# Altium PCB HandHeld_Terminal_V2.PcbDoc (part 1 of 2)
Units mil, origin at the board's own origin, x right, y up, seen from the top; angles counter-clockwise.
Board outline 1653.54 x 2401.57 mil, 4 copper layers (Top Layer, GND_02, PWR_03, Bottom Layer), stack 23.756 mil thick; 120 components, 79 nets, 410 pads, 246 vias.
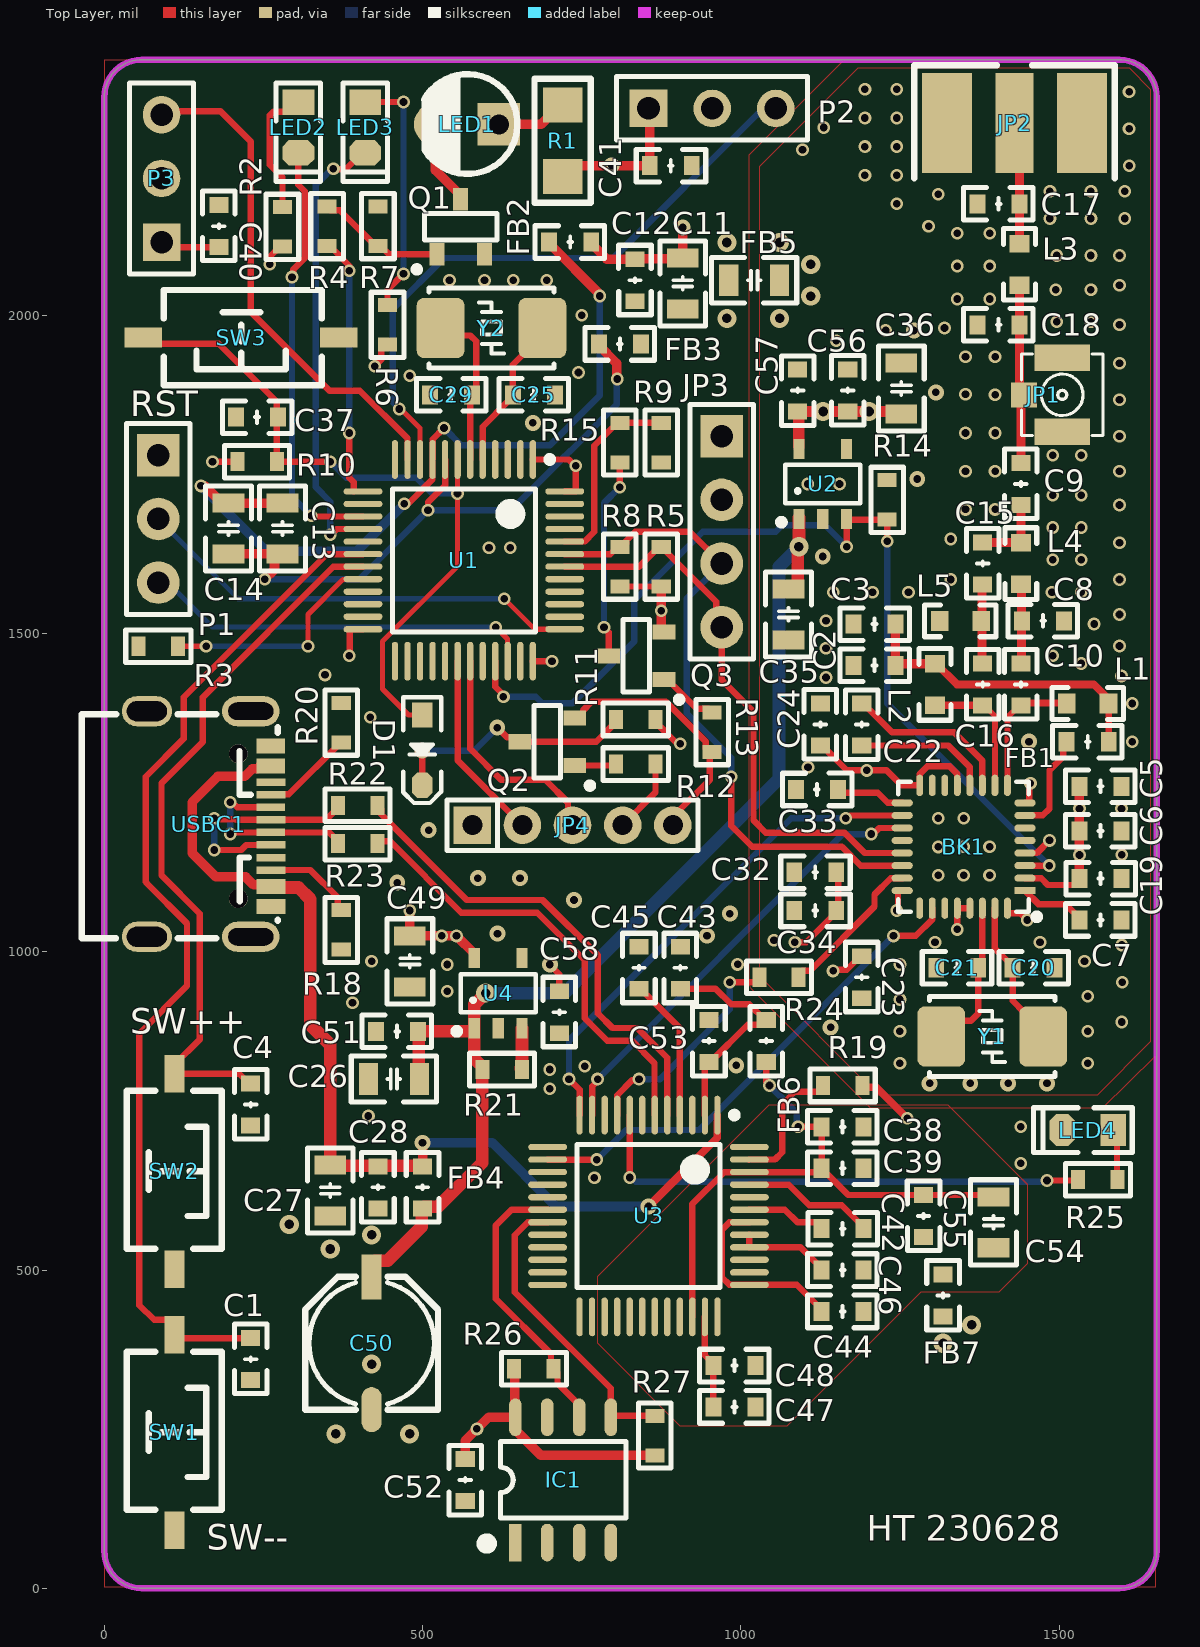
[diagram p0: Top Layer view]
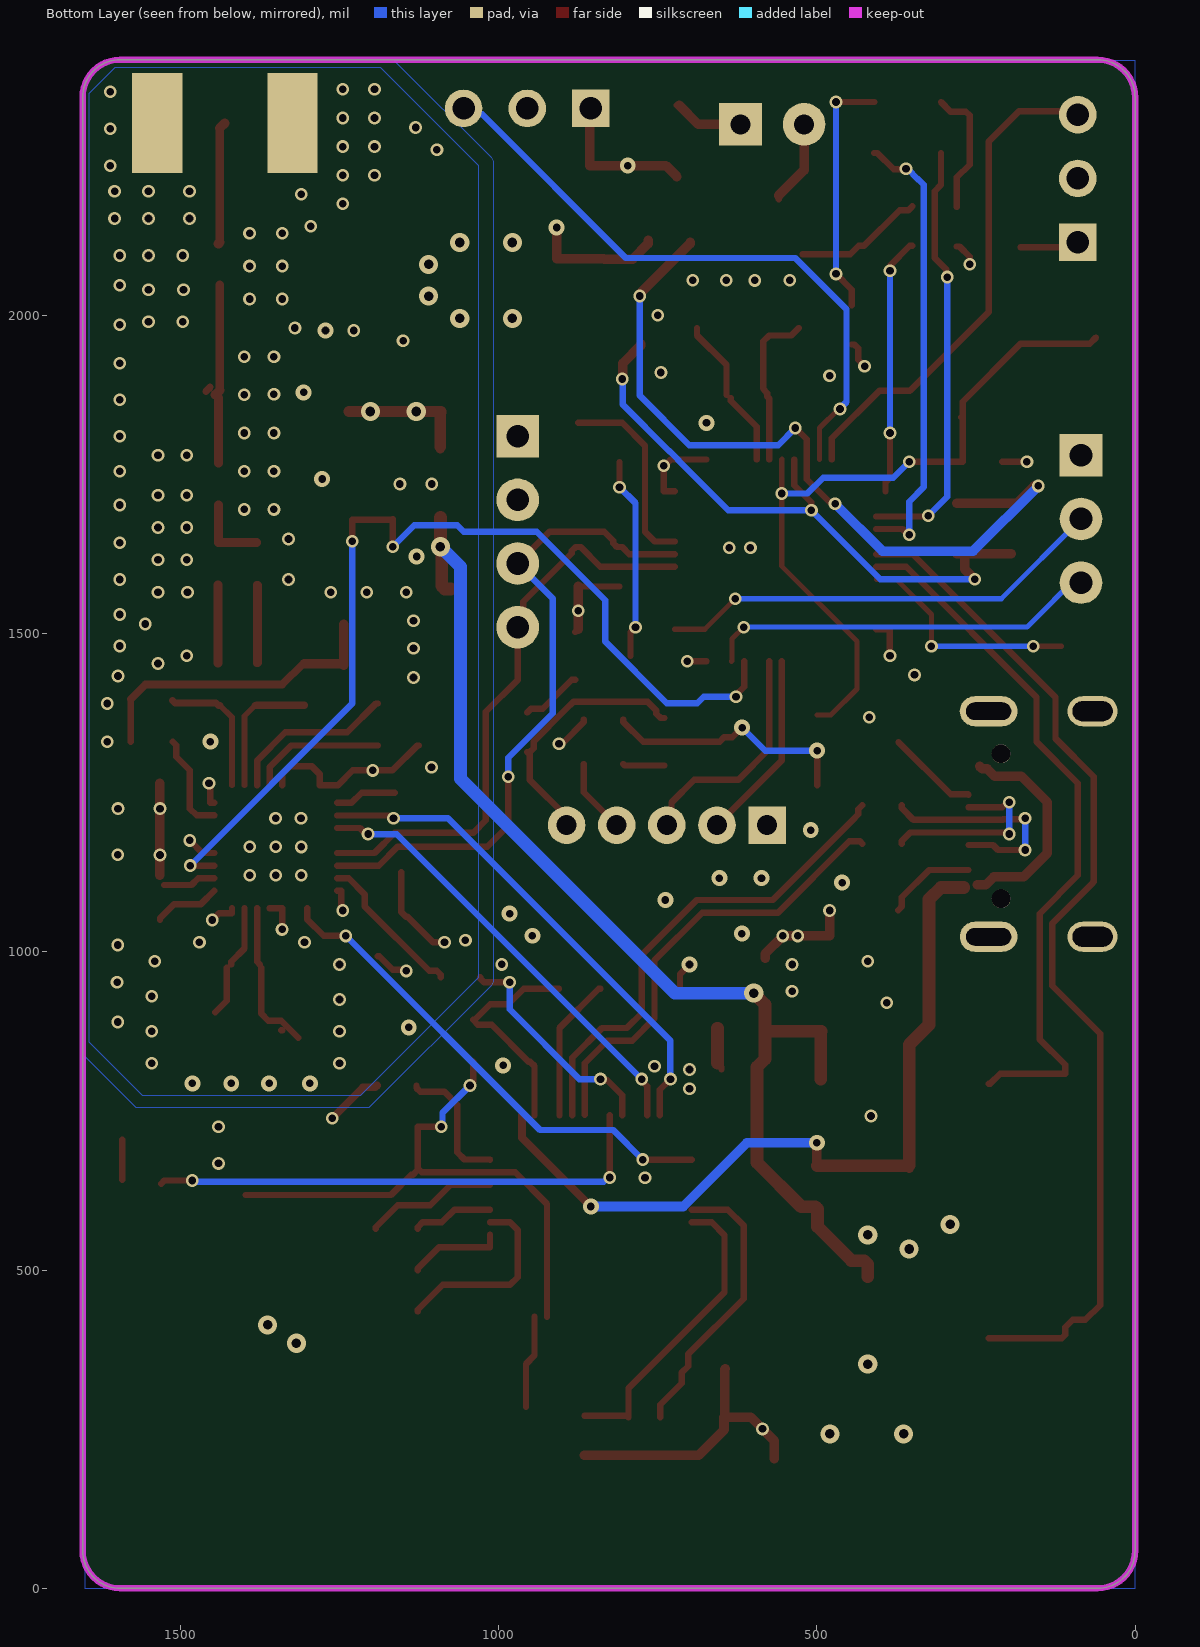
[diagram p1: Bottom Layer view, seen from below]
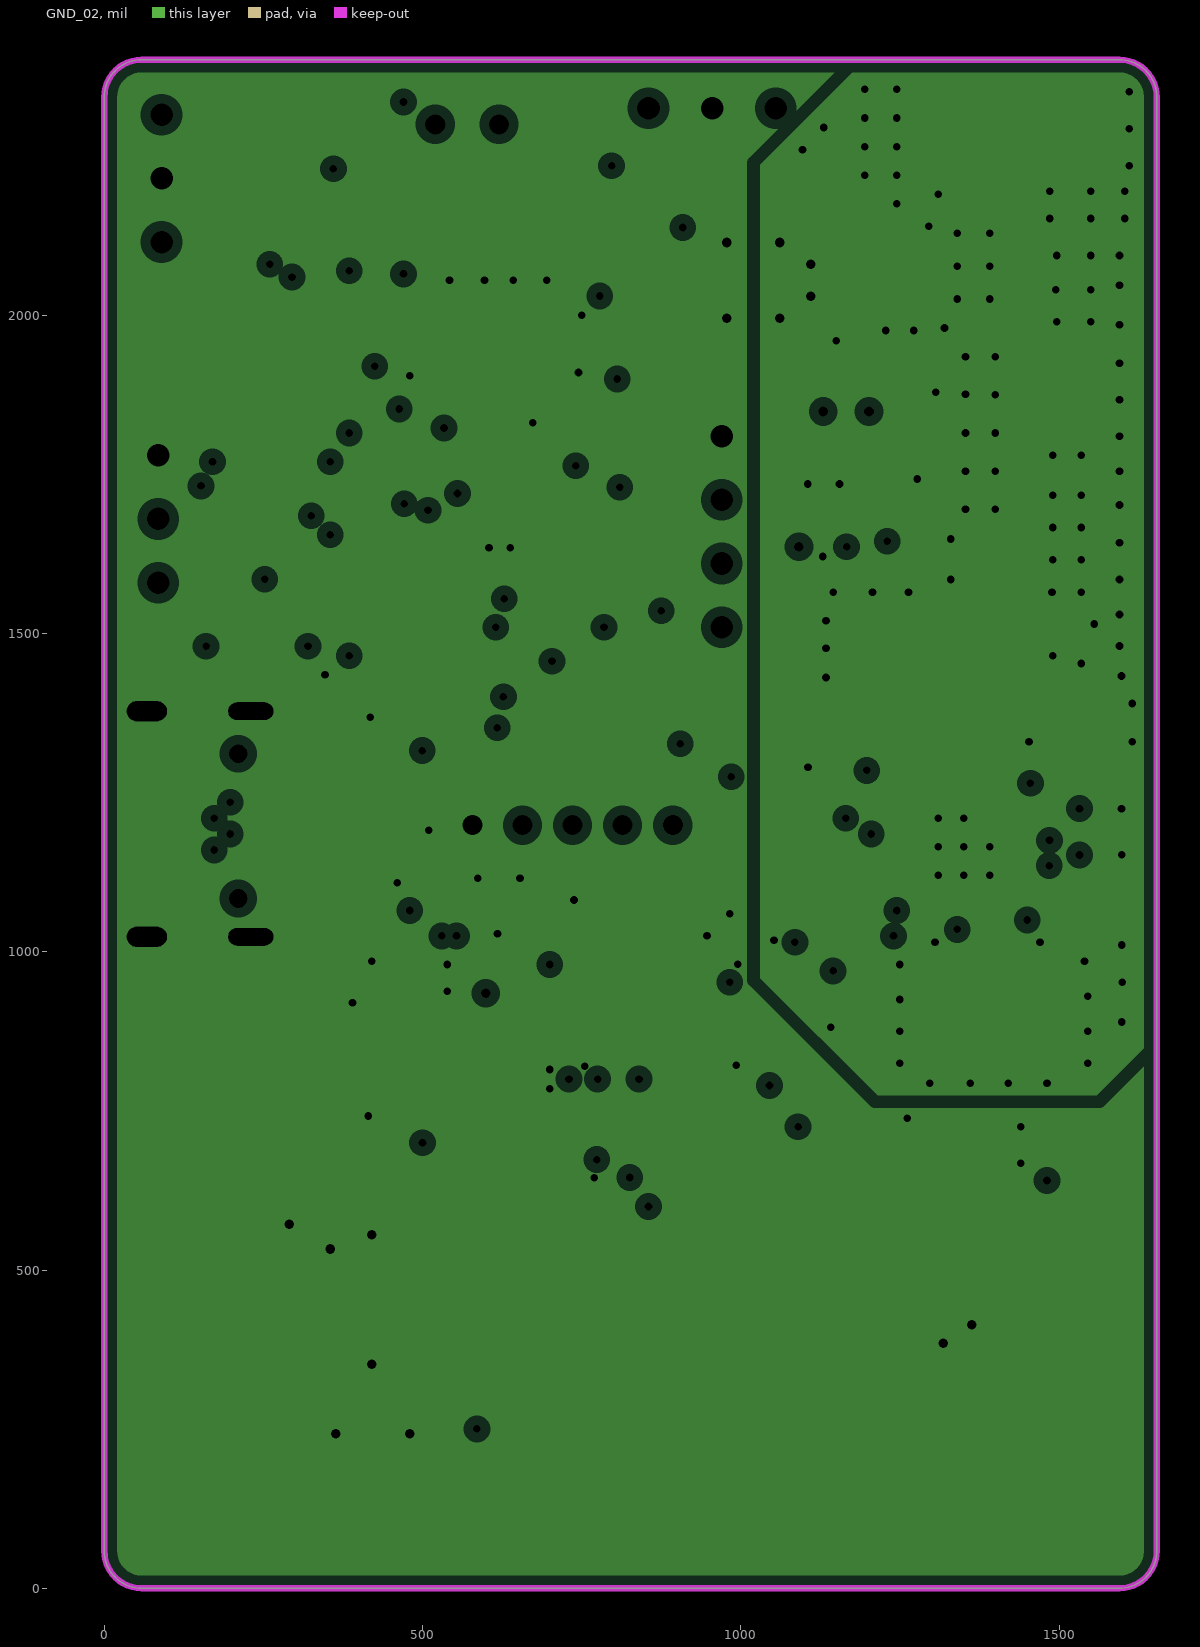
[diagram p2: GND_02, clearances drawn from the general rule]
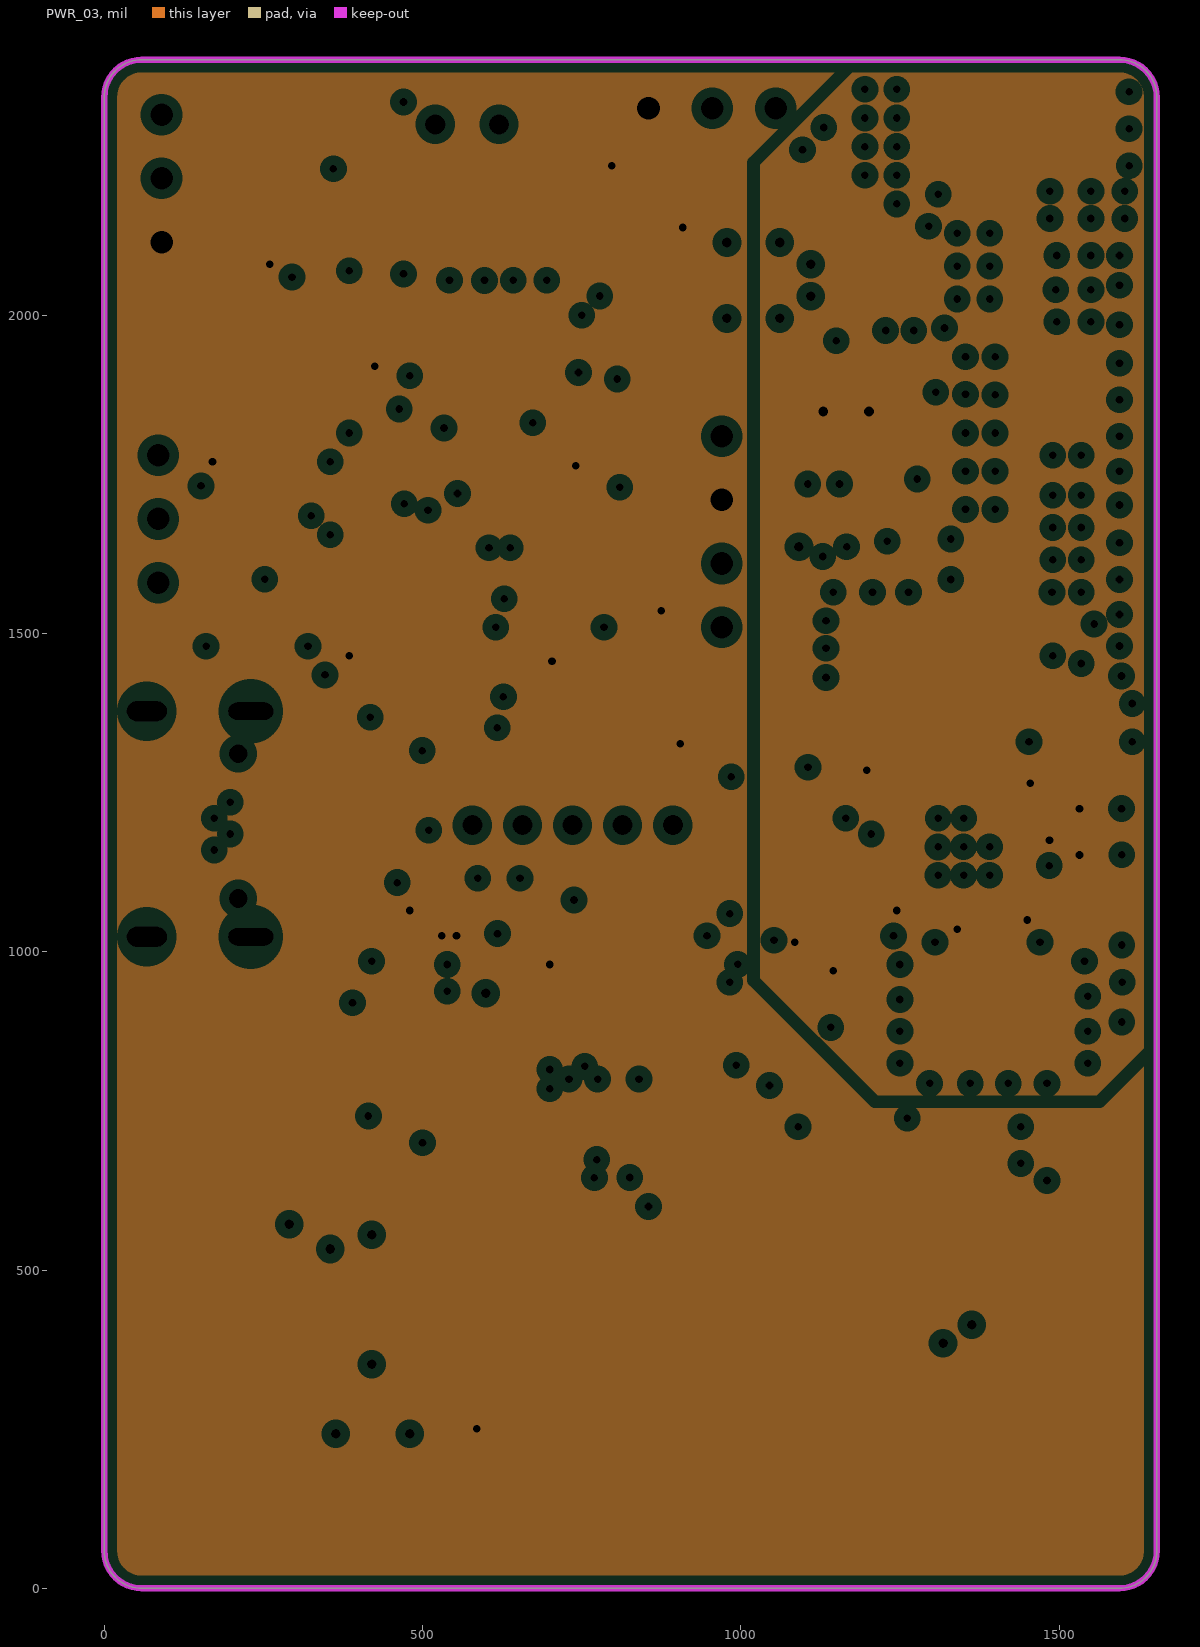
[diagram p3: PWR_03, clearances drawn from the general rule]

## Layer stack, top to bottom
Top Solder: solder mask 0.4, Solder Resist, Dk 3.5
Top Layer: signal copper 1.4
Dielectric 2: prepreg 2.8, PP-006, Dk 4.1
GND_02: plane copper 1.378, net (Multiple Nets)
Dielectric 1: dielectric 12.6, FR-4, Dk 4.8
PWR_03: plane copper 1.378, net (Multiple Nets)
Dielectric 3: prepreg 2.8, PP-006, Dk 4.1
Bottom Layer: signal copper 1.4
Bottom Solder: solder mask 0.4, Solder Resist, Dk 3.5

## Board outline
0,59.06 0,2342.52 cw(c59.06,2342.52) 59.06,2401.57 1594.49,2401.57 cw(c1594.49,2342.52) 1653.54,2342.52 1653.54,59.06 cw(c1594.49,59.06) 1594.49,0 59.06,0 cw(c59.06,59.06)

## Design rules (kind name [scope] priority, off if disabled: settings)
AssemblyTestPointUsage [All] p0: scope1count=1 scope1_0_kind=Board scope1_0_value=Board scope2count=1 scope2_0_kind=Board scope2_0_value=Board commentlength=0
AssemblyTestpoint [All] p0: scope1count=1 scope1_0_kind=Board scope1_0_value=Board scope2count=1 scope2_0_kind=Board scope2_0_value=Board commentlength=0
Clearance RF_Pour_Clearance [All] p0 off: scope1count=1 scope1_0_kind=NetClass scope1_0_value=RF scope2count=1 scope2_0_kind=Board scope2_0_value=Board commentlength=48 gap=15 // Protel DXP Scope 2 Expression Was: InPolygon
Clearance Chip_Pin [All] p0: scope1count=1 scope1_0_kind=Component scope1_0_value=BK1','USBC1 scope2count=1 scope2_0_kind=Board scope2_0_value=Board commentlength=0 gap=8
Clearance [All] p0: scope1count=1 scope1_0_kind=Board scope1_0_value=Board scope2count=1 scope2_0_kind=Board scope2_0_value=Board commentlength=0 gap=8
Clearance Frame_Shrink [All] p0 off: scope1count=1 scope1_0_kind=Layer scope1_0_value=TOP scope2count=1 scope2_0_kind=Board scope2_0_value=Board commentlength=48 gap=20 // Protel DXP Scope 2 Expression Was: InPolygon
Clearance RF_Pour_Clearance [InNetClass('RF') vs InPolygon] p1: gap=15 ignorepadtopadclearanceinfootprint=TRUE
Clearance Chip_Pin [InComponent('BK1','USBC1')] p2: gap=8 ignorepadtopadclearanceinfootprint=TRUE
Clearance Frame_Shrink [OnLayer('Keep-Out Layer') vs InPolygon] p3: gap=20 ignorepadtopadclearanceinfootprint=FALSE
Clearance [All] p4: gap=8 ignorepadtopadclearanceinfootprint=TRUE
ComponentClearance [All] p0: scope1count=1 scope1_0_kind=Board scope1_0_value=Board scope2count=1 scope2_0_kind=Board scope2_0_value=Board commentlength=0 gap=10 collisioncheckmode=3
DiffPairsRouting [All] p0: scope1count=1 scope1_0_kind=Board scope1_0_value=Board scope2count=1 scope2_0_kind=Board scope2_0_value=Board commentlength=0
DiffPairsRouting [All] p1: maxlimit=10 minlimit=10 mostfreqgap=10 toplayer_minwidth=8 toplayer_maxwidth=15 toplayer_prefwidth=8 bottomlayer_minwidth=8 bottomlayer_maxwidth=15 bottomlayer_prefwidth=8 maxuncoupledlength=500
FabricationTestPointUsage [All] p0: scope1count=1 scope1_0_kind=Board scope1_0_value=Board scope2count=1 scope2_0_kind=Board scope2_0_value=Board commentlength=0 valid=0 allowmultiple=FALSE
FabricationTestpoint [All] p0: scope1count=1 scope1_0_kind=Board scope1_0_value=Board scope2count=1 scope2_0_kind=Board scope2_0_value=Board commentlength=0 side=3 testpointundercomponent=TRUE minsize=40 maxsize=100 preferedsize=60 minholesize=0 maxholesize=40 preferedholesize=32 testpointgrid=1
FanoutControl Fanout_Default [All] p0: scope1count=1 scope1_0_kind=Board scope1_0_value=Board scope2count=1 scope2_0_kind=Board scope2_0_value=Board commentlength=30 // Fanout_Default (Default Rule)
FanoutControl Fanout_Small [All] p0 off: scope1count=1 scope1_0_kind=Board scope1_0_value=Board scope2count=1 scope2_0_kind=Board scope2_0_value=Board commentlength=84 // Protel DXP Scope 1 Expression Was: (CompPinCount < 5)   Fanout_Small (Default Rule)
FanoutControl Fanout_SOIC [All] p0 off: scope1count=1 scope1_0_kind=Board scope1_0_value=Board scope2count=1 scope2_0_kind=Board scope2_0_value=Board commentlength=71 // Protel DXP Scope 1 Expression Was: IsSOIC   Fanout_SOIC (Default Rule)
FanoutControl Fanout_LCC [All] p0 off: scope1count=1 scope1_0_kind=Board scope1_0_value=Board scope2count=1 scope2_0_kind=Board scope2_0_value=Board commentlength=69 // Protel DXP Scope 1 Expression Was: IsLCC   Fanout_LCC (Default Rule)
FanoutControl Fanout_BGA [All] p0 off: scope1count=1 scope1_0_kind=Board scope1_0_value=Board scope2count=1 scope2_0_kind=Board scope2_0_value=Board commentlength=69 // Protel DXP Scope 1 Expression Was: IsBGA   Fanout_BGA (Default Rule)
Height [All] p0: scope1count=1 scope1_0_kind=Board scope1_0_value=Board scope2count=1 scope2_0_kind=Board scope2_0_value=Board commentlength=0
HoleSize [All] p0: scope1count=1 scope1_0_kind=Board scope1_0_value=Board scope2count=1 scope2_0_kind=Board scope2_0_value=Board commentlength=0 absolutevalues=TRUE maxlimit=100 minlimit=1 maxpercent=80.000 minpercent=20.000
HoleToHoleClearance [All] p0: scope1count=1 scope1_0_kind=Board scope1_0_value=Board scope2count=1 scope2_0_kind=Board scope2_0_value=Board commentlength=0
LayerPairs [All] p0: scope1count=1 scope1_0_kind=Board scope1_0_value=Board scope2count=1 scope2_0_kind=Board scope2_0_value=Board commentlength=0 enforce=TRUE
MatchedLengths DiffPair_MatchedLengths [All] p0 off: scope1count=1 scope1_0_kind=Board scope1_0_value=Board scope2count=1 scope2_0_kind=Board scope2_0_value=Board commentlength=64 tolerance=1000 amplitude=200 gap=20 style=90-Degree // Protel DXP Scope 1 Expression Was: InDifferentialPair ('UD')
MatchedLengths DiffPair_MatchedLengths [InDifferentialPair ('UD')] p1: tolerance=1000 checknetsindiffpair=FALSE checkdiffpairvsdiffpair=TRUE checkxsignals=TRUE checkothers=TRUE
MinimumSolderMaskSliver [All] p0: scope1count=1 scope1_0_kind=Board scope1_0_value=Board scope2count=1 scope2_0_kind=Board scope2_0_value=Board commentlength=0
NetAntennae [All] p0: scope1count=1 scope1_0_kind=Board scope1_0_value=Board scope2count=1 scope2_0_kind=Board scope2_0_value=Board commentlength=0
PasteMaskExpansion [All] p0: scope1count=1 scope1_0_kind=Board scope1_0_value=Board scope2count=1 scope2_0_kind=Board scope2_0_value=Board commentlength=0 expansion=0
PlaneClearance [All] p0: scope1count=1 scope1_0_kind=Board scope1_0_value=Board scope2count=1 scope2_0_kind=Board scope2_0_value=Board commentlength=0 clearance=15
PlaneClearance [All] p1: clearance=15
PlaneConnect [All] p0: scope1count=1 scope1_0_kind=Board scope1_0_value=Board scope2count=1 scope2_0_kind=Board scope2_0_value=Board commentlength=0 planeconnectstyle=Direct reliefexpansion=20 reliefentries=4 reliefconductorwidth=15 reliefairgap=10
PlaneConnect [All] p1: planeconnectstyle=Direct reliefexpansion=20 reliefentries=4 reliefconductorwidth=15 reliefairgap=10
PolygonConnect PolygonConnect_RF [All] p0: scope1count=1 scope1_0_kind=ComponentClass scope1_0_value=RF_Comp scope2count=1 scope2_0_kind=Board scope2_0_value=Board commentlength=0 connectstyle=Direct reliefconductorwidth=10 reliefentries=4 polygonreliefangle="90 Angle"
PolygonConnect [All] p0: scope1count=1 scope1_0_kind=Board scope1_0_value=Board scope2count=1 scope2_0_kind=Board scope2_0_value=Board commentlength=0 connectstyle=Relief reliefconductorwidth=15 reliefentries=4 polygonreliefangle="90 Angle"
PolygonConnect PolygonConnect_RF [InComponentClass('RF_Comp')] p1: connectstyle=Direct reliefconductorwidth=10 reliefentries=4 polygonreliefangle="90 Angle" airgapwidth=10
PolygonConnect [All] p2: thpad.connectstyle=Relief thpad.reliefconductorwidth=15 thpad.reliefentries=4 thpad.polygonreliefangle="90 Angle" thpad.airgapwidth=10 smdpad.connectstyle=Relief smdpad.reliefconductorwidth=10 smdpad.reliefentries=4 smdpad.polygonreliefangle="90 Angle" smdpad.airgapwidth=10 via.connectstyle=Direct via.reliefconductorwidth=10 via.reliefentries=4 via.polygonreliefangle="90 Angle" via.airgapwidth=10
RoutingCorners [All] p0: scope1count=1 scope1_0_kind=Board scope1_0_value=Board scope2count=1 scope2_0_kind=Board scope2_0_value=Board commentlength=0 cornerstyle=45-Degree minsetback=100 maxsetback=100
RoutingLayers [All] p0: scope1count=1 scope1_0_kind=Board scope1_0_value=Board scope2count=1 scope2_0_kind=Board scope2_0_value=Board commentlength=0 top layer=Automatic bottom layer=Automatic
RoutingPriority [All] p0: scope1count=1 scope1_0_kind=Board scope1_0_value=Board scope2count=1 scope2_0_kind=Board scope2_0_value=Board commentlength=0
RoutingTopology [All] p0: scope1count=1 scope1_0_kind=Board scope1_0_value=Board scope2count=1 scope2_0_kind=Board scope2_0_value=Board commentlength=0 topology=Shortest
RoutingVias [All] p0: scope1count=1 scope1_0_kind=Board scope1_0_value=Board scope2count=1 scope2_0_kind=Board scope2_0_value=Board commentlength=0 holewidth=12 width=20 viastyle="Through Hole" minholewidth=12 minwidth=18 maxholewidth=25 maxwidth=50
RoutingVias [All] p1: holewidth=12 width=20 viastyle="Through Hole" minholewidth=12 minwidth=18 maxholewidth=25 maxwidth=50
ShortCircuit [All] p0: scope1count=1 scope1_0_kind=Board scope1_0_value=Board scope2count=1 scope2_0_kind=Board scope2_0_value=Board commentlength=0 allowed=FALSE
SilkToBoardRegionClearance [All] p0: scope1count=1 scope1_0_kind=Board scope1_0_value=Board scope2count=1 scope2_0_kind=Board scope2_0_value=Board commentlength=0
SilkToSilkClearance [All] p0: scope1count=1 scope1_0_kind=Board scope1_0_value=Board scope2count=1 scope2_0_kind=Board scope2_0_value=Board commentlength=0
SilkToSilkClearance [All] p1: silktosilkclearance=2
SilkToSolderMaskClearance [All] p0 off: scope1count=1 scope1_0_kind=Board scope1_0_value=Board scope2count=1 scope2_0_kind=Board scope2_0_value=Board commentlength=44 // Protel DXP Scope 1 Expression Was: IsPad
SilkToSolderMaskClearance [IsPad] p1: minsilkscreentomaskgap=2 clearancetoexposedcopper=TRUE
SolderMaskExpansion [All] p0: scope1count=1 scope1_0_kind=Board scope1_0_value=Board scope2count=1 scope2_0_kind=Board scope2_0_value=Board commentlength=0 expansion=4
SolderMaskExpansion [All] p1: expansion=4 istentingtop=FALSE
UnRoutedNet [All] p0: scope1count=1 scope1_0_kind=Board scope1_0_value=Board scope2count=1 scope2_0_kind=Board scope2_0_value=Board commentlength=0
UnpouredPolygon [All] p0: scope1count=1 scope1_0_kind=Board scope1_0_value=Board scope2count=1 scope2_0_kind=Board scope2_0_value=Board commentlength=0
Width [All] p0: scope1count=1 scope1_0_kind=Board scope1_0_value=Board scope2count=1 scope2_0_kind=Board scope2_0_value=Board commentlength=0 maxlimit=30 minlimit=8 preferedwidth=10
Width PWR [All] p0: scope1count=1 scope1_0_kind=NetClass scope1_0_value=PWR scope2count=1 scope2_0_kind=Board scope2_0_value=Board commentlength=0 maxlimit=50 minlimit=8 preferedwidth=15
Width PWR [InNetClass('PWR')] p1: maxlimit=50 minlimit=8 preferedwidth=15
Width [All] p2: maxlimit=30 minlimit=8 preferedwidth=10
25 further rules are at their usual default settings.

## Classes and differential pairs
component class RF_Comp: C2 C3 C8 C9 C10 C15 C16 C17 C18 JP1 JP2 L1 L2 L3 L4 L5
net class RF: NetC8_2 NetC9_1 NetC9_2 NetC15_1 NetC17_1
net class PWR: 3V3 +3.3V +3.3VA GND GNDA GNDRF RF3V3 USB_5V VBUS VDDA VSSA
differential pair " ": +UD_P -UD_N

## Components (designator, comment, footprint, x,y, rotation, side; value= is the part's Value field where it differs from the comment)
BK1 "BK9535" "QFN32 5x5_N" 1350,1165 r90 top
C1 "Cap" "C 0603_L" 230,360 r90 top
C2 "Cap" "C 0603_L" 1210,1450 r0 top
C3 "Cap" "C 0603_L" 1210,1514.8 r0 top
C4 "Cap" "C 0603_L" 230,760 r90 top
C5 "Cap" "C 0603_L" 1565,1260 r180 top
C6 "Cap" "C 0603_L" 1565,1190 r180 top
C7 "Cap" "C 0603_L" 1565,1050 r180 top
C8 "Cap" "C 0603_L" 1475,1520 r180 top
C9 "Cap" "C 0603_L" 1440,1735 r90 top
C10 "Cap" "C 0603_L" 1440,1420 r90 top
C11 "Cap" "C 0805_L" 908.78,2050 r90 top
C12 "Cap" "C 0603_L" 833.78,2055 r90 top
C13 "Cap" "C 0805_L" 280,1665 r90 top
C14 "Cap" "C 0805_L" 195,1665 r90 top
C15 "Cap" "C 0603_L" 1380,1610 r90 top
C16 "Cap" "C 0603_L" 1380,1420 r90 top
C17 "Cap" "C 0603_L" 1405,2175 r180 top
C18 "Cap" "C 0603_L" 1405,1985 r180 top
C19 "Cap" "C 0603_L" 1565,1115 r0 top
C20 "Cap" "C 0603_L" 1460,975 r0 top
C21 "Cap" "C 0603_L" 1340,975 r180 top
C22 "Cap" "C 0603_L" 1190,1357.13 r270 top
C23 "Cap" "C 0603_L" 1190,960 r90 top
C24 "Cap" "C 0603_L" 1125,1357.13 r90 top
C25 "Cap" "C 0603_L" 675,1875 r180 top
C26 "Cap" "C 0805_L" 455,800 r0 top
C27 "Cap" "C 0805_L" 355,625 r90 top
C28 "Cap" "C 0603_L" 430,630 r90 top
C29 "Cap" "C 0603_L" 545,1875 r0 top
C32 "Cap" "C 0603_L" 1117,1125 r0 top
C33 "Cap" "C 0603_L" 1119.5,1255 r0 top
C34 "Cap" "C 0603_L" 1117,1065 r0 top
C35 "Cap" "C 0805_L" 1075,1530 r270 top
C36 "Cap" "C 0805_L" 1252.15,1884.96 r90 top
C37 "Cap" "C 0603_L" 240,1840 r0 top
C38 "Cap" "C 0603_L" 1160,725 r180 top
C39 "Cap" "C 0603_L" 1160,660 r180 top
C40 "Cap" "C 0603_L" 180,2140 r90 top
C41 "Cap" "C 0603_L" 890,2235 r0 top
C42 "Cap" "C 0603_L" 1160,565 r0 top
C43 "Cap" "C 0603_L" 905,975 r270 top
C44 "Cap" "C 0603_L" 1160,435 r180 top
C45 "Cap" "C 0603_L" 840,975 r270 top
C46 "Cap" "C 0603_L" 1160,500 r180 top
C47 "Cap" "C 0603_L" 990,285 r180 top
C48 "Cap" "C 0603_L" 990,350 r180 top
C49 "Cap" "C 0805_L" 480,985 r270 top
C50 "Cap Pol1" "CM C(5*5.4)" 420,385 r90 top
C51 "Cap" "C 0603_L" 460,875 r180 top
C52 "Cap" "C 0603_L" 567.13,170.31 r270 top
C53 "Cap" "C 0603_L" 950,860 r270 top
C54 "Cap" "C 0805_L" 1397.16,575 r90 top
C55 "Cap" "C 0603_L" 1287.16,585 r90 top
C56 "Cap" "C 0603_L" 1167.96,1881.96 r90 top
C57 "Cap" "C 0603_L" 1089.38,1881.96 r270 top
C58 "Cap" "C 0603_L" 715,905 r90 top
D1 "1N4148" SOD-323 499.58,1316.75 r270 top
FB1 "Ferrite bead" "C 0603_L" 1545,1330 r180 top
FB2 "Ferrite bead" "C 0603_L" 732,2115 r180 top
FB3 "Ferrite bead" "C 0603_L" 810,1955 r180 top
FB4 "Ferrite bead" "C 0603_L" 500,630 r90 top
FB5 "Ferrite bead" "C 0805_L" 1021,2055 r0 top
FB6 "Ferrite bead" "C 0603_L" 1040,860 r270 top
FB7 "Ferrite bead" "C 0603_L" 1317.75,460 r90 top
IC1 "24Cxx" SOP8_L 720.91,170.31 r90 top
JP1 "SMA WIFI 天线接口" COAXIAL/SMD/CON/V/I-PEX/W08-5801 1505,1875 r270 top
JP2 "SMA WIFI 天线接口" SMA-KE 1430,2302 r0 top
JP3 "HDR-1X4" HDR2.54-LI-4P 970,1660 r270 top
JP4 "HDR-1X5" HDR2.0-LI-5P 735.67,1198.86 r0 top
L1 "L" "L 0603" 1545,1390 r0 top
L2 "L" "L 0603" 1305,1420 r90 top
L3 "L" "L 0603" 1438,2080 r270 top
L4 "L" "L 0603" 1440,1610 r270 top
L5 "L" "L 0603" 1345,1520 r0 top
LED1 "红外" "LED 3MM-R" 570,2300 r180 top
LED2 "红色" "LED 0805R" 305,2295 r270 top
LED3 "绿色" "LED 0805G" 410,2295 r270 top
LED4 "蓝色" "LED 0805B" 1545,720 r180 top
P1 "Header 3" HDR2.54-LI-3P 85,1680 r270 top
P2 "Header 3" HDR1X3 855,2325 r0 top
P3 "Header 3" HDR1X3 90,2115 r90 top
Q1 "AO3400" SOT-23-3L 560,2135 r90 top
Q2 "SS8050" SOT-23-3L 700,1330 r180 top
Q3 "SS8550" SOT-23-3L 840,1465 r180 top
R1 "Resistor" "R 1206_L" 720,2275 r270 top
R2 "Resistor" "R 0603_L" 280,2139 r270 top
R3 "Resistor" "R 0603_L" 85,1480 r180 top
R4 "Resistor" "R 0603_L" 350,2140 r270 top
R5 "Resistor" "R 0603_L" 875,1605 r90 top
R6 "Resistor" "R 0603_L" 445,1985 r270 top
R7 "Resistor" "R 0603_L" 430,2140 r270 top
R8 "Resistor" "R 0603_L" 810,1605 r90 top
R9 "Resistor" "R 0603_L" 875,1800 r270 top
R10 "Resistor" "R 0603_L" 240,1770 r180 top
R11 "Resistor" "R 0603_L" 835,1365 r180 top
R12 "Resistor" "R 0603_L" 835,1295 r180 top
R13 "Resistor" "R 0603_L" 955,1345 r90 top
R14 "Resistor" "R 0603_L" 1230,1710 r270 top
R15 "Resistor" "R 0603_L" 810,1800 r90 top
R18 "Resistor" "R 0603_L" 372.28,1034.41 r270 top
R19 "Resistor" "R 0603_L" 1160,790 r0 top
R20 "Resistor" "R 0603_L" 372.28,1360 r270 top
R21 "Resistor" "R 0603_L" 625,815 r180 top
R22 "Resistor" "R 0603_L" 397.87,1230 r0 top
R23 "Resistor" "R 0603_L" 397.87,1170 r180 top
R24 "Resistor" "R 0603_L" 1060,960 r0 top
R25 "Resistor" "R 0603_L" 1561.13,642 r180 top
R26 "Resistor" "R 0603_L" 675,345 r180 top
R27 "Resistor" "R 0603_L" 865,240 r270 top
SW1 "3x6x5" "TSW SMD-3*6*2.5" 110,245 r270 top
SW2 "3x6x5" "TSW SMD-3*6*2.5" 110,655 r270 top
SW3 "3x6x5" "TSW SMD-3*6*2.5" 215,1965 r180 top
U1 "STM32L051C8T6" LQFP48_L 565,1615 r270 top
U2 "RT9013" SOT23-5L 1128.78,1735 r0 top
U3 "SSS1700" LQFP48_L 855,585 r270 top
U4 "RT9013" SOT23-5L 618.78,935 r0 top
USBC1 "TYPE-C 2.0 -16P" USB-C-SMD_TYPE-C-USB-5 164.29,1200.79 r270 top
Y1 "24.576M" "OSC 5032-2P" 1395,867 r180 top
Y2 "8MHz ±20ppm 20pF" "OSC 5032-2P" 608.33,1980 r0 top

## Footprints (in the part's own frame and the unit in brackets; to place one, negate y for a bottom-side part, rotate by r counter-clockwise, add the part's x,y. Pads: shape width x height; smd on the part's side, far side on the other; paste and mask are expansions set on the pad)
"C 0603_L" [mil] "无极性贴片电容                                       淘宝ID:黄晶宝石"
  rect 25x30 smd: 1(-33,0) 2(33,0)
  silkscreen extent -54,-26 55,26
"C 0805_L" [mil] "无极性贴片电容                                        淘宝ID:黄晶宝石"
  rect 30x50 smd: 1(-40,0) 2(40,0)
  silkscreen extent -67,-36 67,36
"CM C(5*5.4)" [mm] "贴片电解电容，直径5mm，高5.4mm            淘宝ID:黄晶宝石"
  rect 1.8x0.8 smd: 1(2.65,0)
  oval 1.8x0.8 smd: 2(-2.65,0)
  silkscreen extent -2.65,-2.65 2.65,2.65
COAXIAL/SMD/CON/V/I-PEX/W08-5801 [mm] "https://shop463601444.taobao.com"
  rect 1x1.05 smd: 1(0,-1.525)
  rect 1.05x2.2 smd: 2(-1.475,0) 3(1.475,0)
  silkscreen extent -1.63,-1.63 1.63,1.63
HDR1X3 [mm] "Connector; Header; 3 Position"
  rect 1.5x1.5 hole 0.9: 1(0,0)
  round 1.5 hole 0.9: 2(2.54,0) 3(5.08,0)
  silkscreen extent -1.27,-1.27 6.35,1.27
HDR2.0-LI-5P [mm] "直插，脚距：2.0mm"
  rect 1.5x1.5 hole 0.8: 1(-4,0)
  round 1.5 hole 0.8: 2(-2,0) 3(0,0) 4(2,0) 5(4,0)
  silkscreen extent -5,-1 5,1
HDR2.54-LI-3P [mm] "排针，3脚"
  rect 1.7x1.7 hole 0.9: 1(-2.54,0)
  round 1.7 hole 0.9: 2(0,0) 3(2.54,0)
  silkscreen extent -3.81,-1.27 3.81,1.27
HDR2.54-LI-4P [mm] "排针，4脚"
  rect 1.7x1.7 hole 0.9: 1(-3.81,0)
  round 1.7 hole 0.9: 2(-1.27,0) 3(1.27,0) 4(3.81,0)
  silkscreen extent -5.08,-1.27 5.08,1.27
"L 0603" [mm] "小功率贴片电感        淘宝ID:黄晶宝石"
  rect 0.7x0.8 smd: 1(-0.83,0) 2(0.83,0)
  silkscreen extent -1.43,-0.64 1.43,0.64
"LED 3MM-R" [mm] "红色3mm直插LED                                   淘宝ID:黄晶宝石"
  rect 1.7x1.7 hole 0.8: 1(-1.27,0)
  round 1.7 hole 0.8: 2(1.27,0)
  silkscreen extent -2.01,-2 1.72,1.98
"LED 0805B" [mil] "蓝色0805LED                                    淘宝ID:黄晶宝石"
  rect 40x50 smd: 1(-40,0)
  oct 40x50 smd: 2(40,0)
  silkscreen extent -70,-35 85,35
"LED 0805G" [mil] "绿色0805LED                              淘宝ID:黄晶宝石"
  rect 40x50 smd: 1(-40,0)
  oct 40x50 smd: 2(40,0)
  silkscreen extent -70,-35 85,35
"LED 0805R" [mil] "红色0805LED                                       淘宝ID:黄晶宝石"
  rect 40x50 smd: 1(-40,0)
  oct 40x50 smd: 2(40,0)
  silkscreen extent -70,-35 85,35
LQFP48_L [mm] "封装库来自淘宝 ID：黄晶宝石 Thin QFP, 48-Leads, Body 7x7mm, Pitch 0.5mm, IPC High Density"
  oval 1.55x0.25 smd: 1(-4.025,2.75) 2(-4.025,2.25) 3(-4.025,1.75) 4(-4.025,1.25) 5(-4.025,0.75) 6(-4.025,0.25) 7(-4.025,-0.25) 8(-4.025,-0.75) 9(-4.025,-1.25) 10(-4.025,-1.75) 11(-4.025,-2.25) 12(-4.025,-2.75) 25(4.025,-2.75) 26(4.025,-2.25) 27(4.025,-1.75) 28(4.025,-1.25) 29(4.025,-0.75) 30(4.025,-0.25) 31(4.025,0.25) 32(4.025,0.75) 33(4.025,1.25) 34(4.025,1.75) 35(4.025,2.25) 36(4.025,2.75)
  oval 0.25x1.55 smd: 13(-2.75,-4.025) 14(-2.25,-4.025) 15(-1.75,-4.025) 16(-1.25,-4.025) 17(-0.75,-4.025) 18(-0.25,-4.025) 19(0.25,-4.025) 20(0.75,-4.025) 21(1.25,-4.025) 22(1.75,-4.025) 23(2.25,-4.025) 24(2.75,-4.025) 37(2.75,4.025) 38(2.25,4.025) 39(1.75,4.025) 40(1.25,4.025) 41(0.75,4.025) 42(0.25,4.025) 43(-0.25,4.025) 44(-0.75,4.025) 45(-1.25,4.025) 46(-1.75,4.025) 47(-2.25,4.025) 48(-2.75,4.025)
  silkscreen extent -4.15,-2.85 2.85,3.55
"OSC 5032-2P" [mil] "5mm*3.2mm*0.8mm(长*宽*高)                  淘宝ID:黄晶宝石"
  rrect30% 75x94.49 smd: 1(-80,0) 2(80,0)
  silkscreen extent -98,-63 98,63
"QFN32 5x5_N" [mm] "32脚，长x宽x高：5x5x0.95mm，脚距：0.5mm"
  rect 0.275x0.85 smd: 1(-1.751,-2.451)
  oval 0.275x0.85 smd: 2(-1.25,-2.451) 3(-0.75,-2.451) 4(-0.25,-2.451) 5(0.25,-2.451) 6(0.75,-2.451) 7(1.25,-2.451) 8(1.75,-2.451) 17(1.75,2.451) 18(1.25,2.451) 19(0.75,2.451) 20(0.25,2.451) 21(-0.25,2.451) 22(-0.75,2.451) 23(-1.25,2.451) 24(-1.75,2.451)
  oval 0.85x0.275 smd: 9(2.451,-1.75) 10(2.451,-1.25) 11(2.451,-0.75) 12(2.451,-0.25) 13(2.451,0.25) 14(2.451,0.75) 15(2.451,1.25) 16(2.451,1.75) 25(-2.451,1.75) 26(-2.451,1.25) 27(-2.451,0.75) 28(-2.451,0.25) 29(-2.451,-0.25) 30(-2.451,-0.75) 31(-2.451,-1.25) 32(-2.451,-1.75)
  round 0.025 smd paste+0 mask+0.102: " "(0,0)
  silkscreen extent -2.92,-3.05 2.6,2.6
"R 0603_L" [mil] "1/10W贴片电阻                 淘宝ID:黄晶宝石"
  rect 22x30 smd: 1(-31,0) 2(31,0)
  silkscreen extent -51,-26 51,26
"R 1206_L" [mil] "1/4W贴片电阻"
  rect 55x62 smd: 1(-55.12,0) 2(57.09,0)
  silkscreen extent -96,-44 98,44
SMA-KE [mm] "SMA 偏脚射频天线座     淘宝ID:黄晶宝石"
  rect 1.5x4 smd: 1(0,0)
  rect 2x4 smd: 2(-2.7,0) 2(2.7,0)
  rect 2x4 smd far side: 3(-2.7,0) 3(2.7,0)
  silkscreen extent -4,-2.2 4,2.3
SOD-323 [mm] "1.8x1.3X0.9mm（长宽高，不包括引脚）"
  rect 1x0.8 smd: 1(-1.4,0)
  oct 1x0.8 smd: 2(1.4,0)
  silkscreen extent -2.11,-0.76 2.11,0.76
SOP8_L [mm] "5*6*1.8mm（长宽高）封装库来自淘宝卖家 ID：黄晶宝石"
  rect 1.5x0.5 smd: 1(-2.5,1.905)
  oval 1.5x0.5 smd: 2(-2.5,0.635) 3(-2.5,-0.635) 4(-2.5,-1.905) 5(2.5,-1.905) 6(2.5,-0.635) 7(2.5,0.635) 8(2.5,1.905)
  silkscreen extent -2.69,-2.5 1.52,3.2
SOT23-5L [mm] "3x1.6x1.1mm(长宽高) 封装库来自淘宝卖家 ID：黄晶宝石"
  rect 0.45x0.8 smd: 1(-0.95,-1.4) 2(0,-1.4) 3(0.95,-1.4) 4(0.95,1.4) 5(-0.95,1.4)
  silkscreen extent -1.78,-1.65 1.5,0.76
SOT-23-3L [mm]
  rect 0.9x0.6 smd: 1(-1,0.95) 2(-1,-0.95) 3(1.2,0)
  silkscreen extent -1.72,-1.45 0.64,1.87
"TSW SMD-3*6*2.5" [mm] "3*6*2.5mm"
  rect 1.5x0.8 smd: 1(-3.9,0) 2(3.9,0)
  silkscreen extent -3.21,-1.9 3.09,1.9
USB-C-SMD_TYPE-C-USB-5 [mm]
  oval 1.2x2.3 hole 0.7 slot 1.8 at 90 deg: 0(-4.5,1.675) 0(4.5,1.675)
  oval 1.2x2 hole 0.8 slot 1.6 at 90 deg: 0(-4.5,-2.475) 0(4.5,-2.475)
  rect 0.3x1.15 smd: A1(-3.263,2.473) A4(-2.462,2.471) A5(-1.162,2.475) A6(-0.162,2.475) A7(0.337,2.473) A9(2.638,2.475) A12(3.438,2.475) B1(3.138,2.475) B4(2.337,2.475) B5(1.838,2.475) B6(0.838,2.475) B7(-0.663,2.473) B9(-2.162,2.471) B12(-2.963,2.473)
  rect 0.3x1.148 smd: A8(-1.663,2.475) B8(1.337,2.475)
  round 0.75 hole 0.75 unplated: ""(-2.803,1.175) ""(2.978,1.175)
  silkscreen extent -4.38,-5.08 4.56,2.75

## Part data
BK1: library part BK9530
C1 C2 C3 C4 C5 C6 C7 C8 C9 C10 C11 C12 C13 C14 C15 C16 C17 C18 C19 C20 C21 C22 C23 C24 C25 C26 C27 C28 C29 C32 C33 C34 C35 C36 C37 C38 C39 C40 C41 C42 C43 C44 C45 C46 C47 C48 C49 C51 C52 C53 C54 C55 C56 C57 C58: "Capacitor"
C50: "Polarized Capacitor (Radial)"
D1: "开关二极管"
FB1 FB2 FB3 FB4 FB5 FB6 FB7: "铁氧体磁珠"
IC1: "外置EEPROM"
JP1 JP2: library part SMA, "SMA-2.4G射频天线接口"
JP3: library part "Header 4", "4P接插件"
JP4: library part "Header 5", "5P接插件"
L1 L2 L3 L4 L5: "小功率贴片电感"
LED1 LED2 LED3 LED4: library part LED-SMD, "贴片LED"
P1 P2 P3: "Header, 3-Pin"
Q1: library part NMOS-2, "N-Channel Power MOSFET"
Q2: library part 8050-SMD, "高频放大-NPN型"
Q3: library part 8550-SMD, "高频放大-PNP型"
SW1 SW2 SW3: library part "TSW 3x6", "3x6轻触开关"
U1: library part STM32F103C8T6, "ARM"
U2 U4: "LDO"
U3: "USB音频芯片"
USBC1: library part "USB2.0 Type-C 16Pin母座", "USB2.0 Type-C 母座 16Pin"
Y1: library part XTAL, "Crystal Oscillator"
Y2: library part "SMD-5032_2P 8MHz 20ppm 20pF", "贴片晶振"

## Via types
v1: diameter 20, hole 12, Top Layer to Bottom Layer, tented both sides, 201 vias
v2: diameter 25, hole 12, Top Layer to Bottom Layer, tented both sides, 27 vias
v3: diameter 30, hole 15, Top Layer to Bottom Layer, tented both sides, 18 vias

## Nets (pads, with @x,y where several pads share a name; then routed paths per layer and width w, separated by ;. In a path a pad name is that pad's centre, name@x,y a point inside that pad or via, vN(x,y) a via of type N, cw(c..) or ccw(c..) an arc to the next point about the centre after c; other vN are vias at no path point)
3V3: C11.2 C12.2 C40.1 C41.1 C49.1 C52.1 C58.2 FB2.1 IC1.8 JP3.2 P2.1 P3.1 Q3.2 R1.2 R2.2 R5.1 R6.2 R8.1 R10.2 R11.1 R26.2 R27.2 U1.1 U1.24 U1.36 U1.48 U4.5 | length 1738.7
  Top Layer w10: P3.1@90,2115 98,2107 C40.1@180,2107 ; v1(170,1770) R10.2@209,1770 ; v1(260,2080) 260,2092 276,2108 R2.2@280,2108 ; v1(385,1465) 385.47,1465.47 385.47,1506.65 385.55,1506.73 U1.24@406.54,1506.73 ; v1(425,1920) 435,1930 435,1948 441,1954 R6.2@445,1954 ; U1.36@673.27,1456.54 v1(703.46,1456.54) ; U1.1@673.27,1773.46 729.7,1773.46 739.59,1763.58 v1(740.56,1763.58) 740.56,1723.35 740.48,1723.27 U1.48@723.46,1723.27 ; v2(700,980) 715,965 C58.2@715,938 ; R8.1@810,1574 R5.1@875,1574 ; R11.1@866,1365 866,1361 898.4,1328.6 903.17,1328.6 v1(905.09,1326.68) ; Q3.2@875,1506.77 Q3.2@879.37,1502.4
  Top Layer w15: v1(480,1065) C49.1@480,1025 v1(530,1025) v1(553.39,1025) 581.38,997.01 U4.5@581.38,990.12 ; C52.1@567.13,203.31 567.13,232.13 603.74,268.74 IC1.8@645.91,268.74 ; R26.2@644,345 645.01,343.99 645.01,269.64 IC1.8@645.91,268.74 ; R1.2@720,2217.91 737.09,2235 C41.1@857,2235 857,2323 P2.1@855,2325 ; FB2.1@765,2117.5 FB2.1@765,2115 765,2112.5 789.5,2088 C12.2@833.78,2088 834.78,2089 C11.2@908.78,2089 ; R27.2@865,209 685.96,209 645.91,249.05 IC1.8@645.91,268.74 ; Q3.2@875,1506.77 R5.1@875,1574 ; C11.2@908.78,2090 v2(908.78,2138)
  other v1: 585.43,250.43 875,1535.87
  other v2: 797.04,2235
+3.3V: C43.2 C53.2 FB6.1 U3.2 | length 358.8
  Top Layer w10: C43.2@905,942 960.34,942 984.84,917.5 1013,917.5 1037.5,893 FB6.1@1040,893 1032.5,885.5 1011,885.5 952.5,827 C53.2@950,827 943.58,820.58 U3.2@943.58,743.46
+3.3VA: C38.2 C39.2 C54.2 C55.2 FB6.2 U3.34 U3.46 | length 917.4
  Top Layer w10: U3.34@923.9,426.54 923.9,603.9 973.82,653.82 1013.39,653.82 U3.46@1013.46,653.9 1120.9,653.9 C39.2@1127,660 ; FB6.2@1040,827 1040,795 v1(1045,790) ; v1(1090,725) C38.2@1127,725 C39.2@1127,660 ; C54.2@1397.16,618 C55.2@1287.16,618 1169,618 1137,650 1134.5,650 1127,657.5 C39.2@1127,660
  Bottom Layer w10: v1(1045,790) 1088.09,746.91 1088.09,726.91 v1(1090,725)
BOOT0: R9.1 R15.2 U1.44 | length 308
  Top Layer w10: U1.44@723.46,1644.53 723.54,1644.61 754.79,1644.61 770,1659.81 770,1795 806,1831 R15.2@810,1831 R9.1@875,1831
CE: BK1.3 R14.2 U1.33 U2.3 | length 1566.7
  Top Layer w10: U1.33@614.21,1456.54 614.29,1456.46 614.29,1416.32 627.04,1403.57 v1(627.04,1400.87) ; v1(1166.18,1636.38) U2.3@1166.18,1679.88 1167.06,1679 R14.2@1230,1679 v1(1230,1645) ; BK1.3@1446.5,1135.47 v1(1484.54,1135.47)
  Bottom Layer w10: v1(627.04,1400.87) 677.61,1400.87 687.81,1390.67 735.67,1390.67 832.52,1487.52 832.52,1552.52 940,1660 1055,1660 1065,1670 1132.56,1670 v1(1166.18,1636.38) ; v1(1230,1645) 1230,1390 v1(1484.54,1135.47)
D+: R22.1 USBC1.A6 USBC1.B6 | length 349.1
  Top Layer w10: v1(172.87,1160) 215.4,1160 223.21,1167.81 USBC1.B6@261.73,1167.81 ; v1(172.87,1210) 174.79,1208.09 181.86,1208.09 181.94,1208 207.4,1208 208.22,1207.18 USBC1.A6@261.73,1207.18 348.06,1207.18 366.87,1226 R22.1@366.87,1230
  Bottom Layer w10: v1(172.87,1160) v1(172.87,1210)
D-: R23.2 USBC1.A7 USBC1.B7 | length 296.8
  Top Layer w10: v1(197.87,1185) 200.58,1185 203.08,1187.5 USBC1.A7@261.67,1187.5 353.37,1187.5 366.87,1174 R23.2@366.87,1170 ; v1(197.87,1235) 200.58,1235 208.71,1226.87 USBC1.B7@261.67,1226.87
  Bottom Layer w10: v1(197.87,1185) v1(197.87,1235)
DTR: JP4.4 R12.1 | length 117.5
  Top Layer w10: JP4.4@814.41,1198.86 866,1250.46 R12.1@866,1295